# Altium PCB H202.PcbDoc (part 4 of 4)
Units mm, origin at the board's own origin, x right, y up, seen from the top; angles counter-clockwise.
Board outline 35.5 x 51.5 mm, 2 copper layers (Top Layer, Bottom Layer); 187 components, 179 nets, 669 pads, 25 vias.
Unrouted connection lines stored in the file: 414.
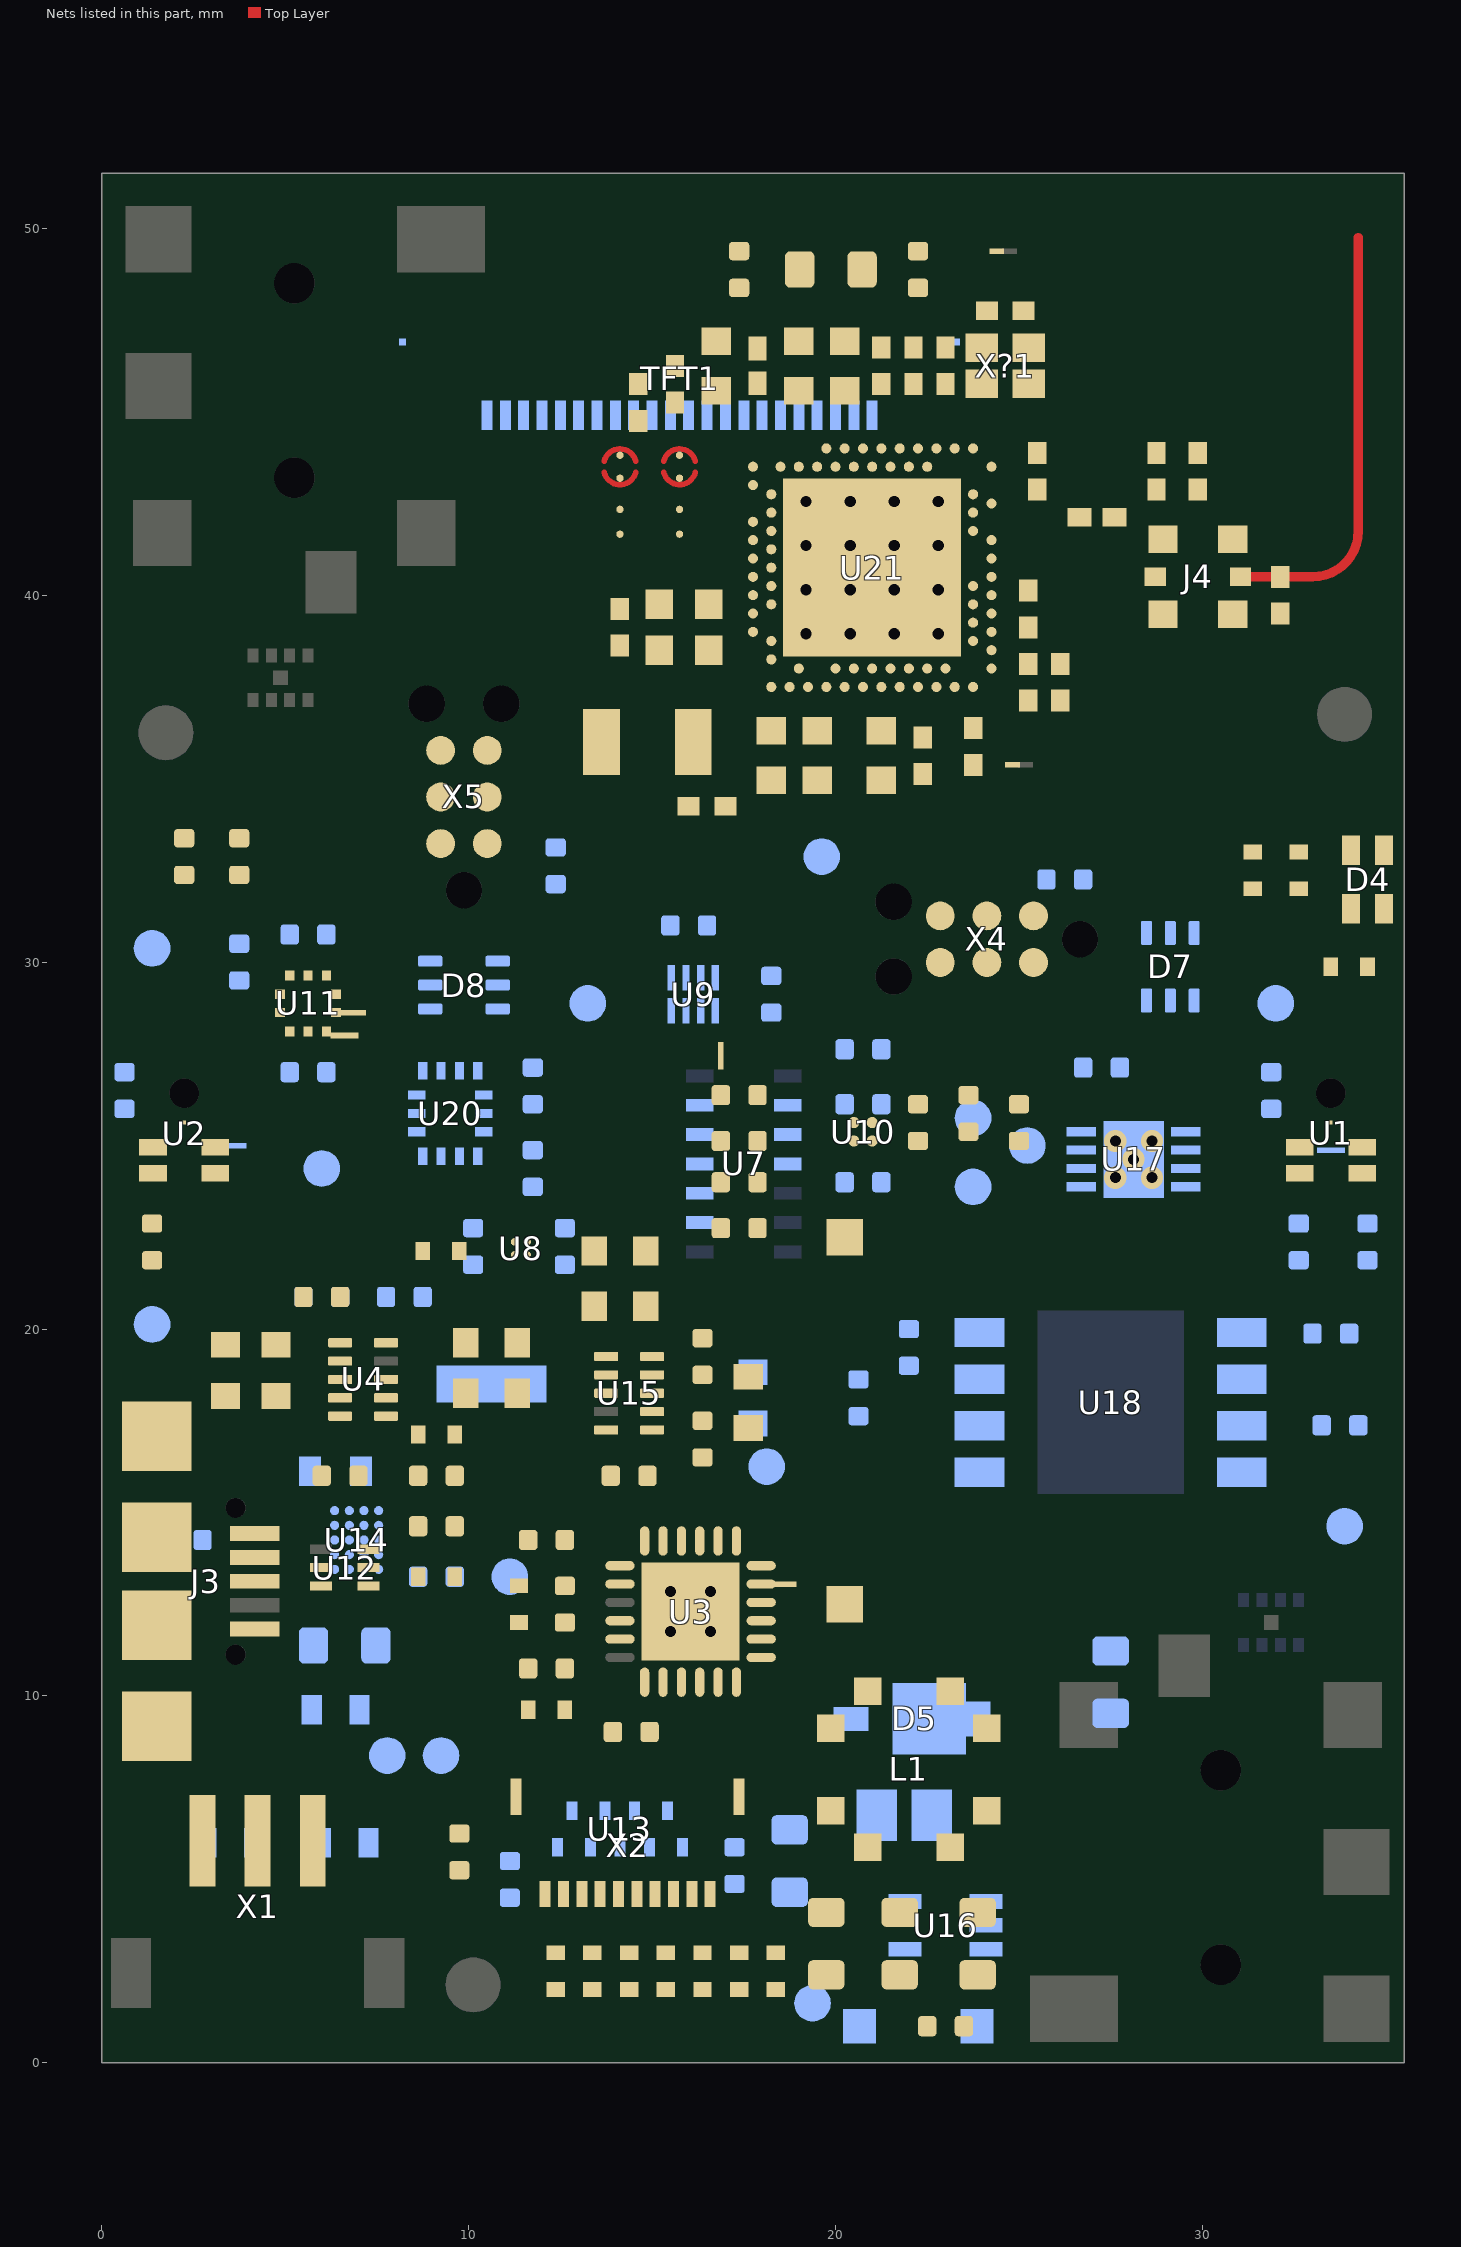
[diagram p2: the nets of this part, all layers, seen from the top]

## Part data (continued)
X2: "10 Position FFC, FPC Connector Contacts, Top and Bottom 0.020\" (0.50mm) Surface Mount, Right Angle", Actuator Color=Black, Current Rating=500mA, Flammability Rating="UL94 V-0", Housing Color=White, Manufacturer=Molex, Manufacturer Part Number=503480-1000, Max Operating Temperature=85°C, Max Voltage Rating (AC)=50V, Min Operating Temperature=-40°C, Package Quantity=1, Supplier Part Number 1=WM1389CT-ND, Actuator Material=Nylon,Glass,Polyamide, ComponentLink1Description=https://www.verical.com/server-webapp/html/getDatasheet?partID=735332&src-supplier=Verical, ComponentLink1URL=https://www.verical.com/server-webapp/html/getDatasheet?partID=735332&src-supplier=Verical, ComponentLink2Description=http://www.mouser.com/ds/2/276/5034801000_FFC_FPC_CONNECTORS-179433.pdf?src-supplier=Mouser, ComponentLink2URL=http://www.mouser.com/ds/2/276/5034801000_FFC_FPC_CONNECTORS-179433.pdf?src-supplier=Mouser, ComponentLink3Description=http://www.molex.com/webdocs/datasheets/pdf/en-us/5034801000_FFC_FPC_CONNECTORS.pdf?src-supplier=Avnet+Europe, ComponentLink3URL=http://www.molex.com/webdocs/datasheets/pdf/en-us/5034801000_FFC_FPC_CONNECTORS.pdf?src-supplier=Avnet+Europe, ComponentLink4Description=https://www.molex.com/pdm_docs/pk/SPK-503480-001.pdf?src-supplier=Digi-Key, ComponentLink4URL=https://www.molex.com/pdm_docs/pk/SPK-503480-001.pdf?src-supplier=Digi-Key, Contact Material=Bronze, Contact Plating=Gold, Depth=3.6mm, ELV=Compliant, Gender=Receptacle, Halogen Free="Low Halogen", Housing Material=Polymer, Length=6.7mm, Material=Bronze, Mating Cycles=10, Max Voltage Rating (DC)=50V, Number of Circuits=10, Number of Contacts=10, Number of Positions=10, Number of Rows=1, Orientation="Right Angle", Packaging="Tape and Reel", pin_1=KEY_1, pin_2=KEY_2, pin_3=KEY_3, pin_4=KEY_4, pin_5=KEY_5, pin_6=KEY_6, pin_7=KEY_7, pin_8=KEY_8, pin_9=GND, pin_10=GND, pin_MP1=MP1, pin_MP2=MP2, Pitch=0.5mm, Pricing 1="1=0.89, 10=0.738, 100=0.6148, 1000=0.4918 (USD)", Radiation Hardening=No, REACH SVHC=Unknown, Series="BackFlip, Easy-On 503480", Stackable=No, Stock 1=36029, Supplier 1=Digi-Key, Termination=Solder, Voltage Rating=50V, Voltage Rating (AC)=50V, Wire/Cable Type=Straight
X3: library part XTAL_SMD3215_32.768kHz_9pF_NDK, "XTAL SMD 3215, 32.768kHz, 9pF, ±20ppm", Manufacturer=NDK, Manufacturer Part Number=NX3215SA-32.768K-STD-MUA-9, Part number IPS=00000005419, Artikkelnr Noca=22010049, ComponentLink1Description=Datasheet, ComponentLink2Description="Supplier link", Footprint Doc=XTAL_3215, LatestRevisionDate=2017-10-23, Note="XTAL SMD 32.768kHz", Part Number=XTAL_SMD3215_32.768kHz_9pF_NDK, Pin Count=2, Published=2017-10-23, Publisher="Nordic Semiconductor"
X4 X5: library part TC2030-IDC-NL, "Tag-Connect TC2030-MCP-NL (3x2 pins No Legs)", Manufacturer="Tag-Connect LLC", Manufacturer Part Number=TC2030-IDC-NL
X?1: "XTAL SMD, 32MHz, Cl=8pF, Tol: ±10ppm, Stab: ±15ppm", Manufacturer="Aker Technology USA", Manufacturer Part Number=C1E-32.000-8-1015-X-R, Part number IPS=00000001431, Supplier Part Number 1=2754-C1E-32.000-8-1015-X-R-ND, ComponentLink1Description=Datasheet, ComponentLink1URL=https://www.aker-usa.com/files/content/products/crystals/C1E-General-Specification.pdf, ComponentLink2Description="Supplier link", Footprint Doc=XTAL_2016, LatestRevisionDate=2021-04-06, Note="XTAL SMD 32.000MHz", Part Number=C1E-32.000-8-1015-X-R, Pin Count=4, Published=2016-11-02, Publisher="Aker Technology USA", Supplier 1=Digikey.com
Y1: library part "SPEAKER CMS-151135-078S 15 X 11 MM ENCLOSED", "8 Ohms General Purpose Speaker 700mW 100Hz ~ 20kHz Top Rectangular", Manufacturer=CUI, Max Power Dissipation=1W, Power Rating=700mW, Self Resonant Frequency=550Hz, Supplier Part Number 1=102-4616-ND, ComponentLink1Description=https://www.cui.com/product/resource/digikeypdf/CMS-15113-078x.pdf?src-supplier=Digi-Key, ComponentLink1URL=https://www.cui.com/product/resource/digikeypdf/CMS-15113-078x.pdf?src-supplier=Digi-Key, Impedance=8R, Manufacturer Part Number=CMS-151135-078S, Packaging=Tray, Pricing 1="1=2.07, 10=1.72, 25=1.5888, 50=1.4932, 100=1.4013, 500=1.2016, 1000=1.17 (USD)", Sensing Method=Magnetic, Shape=Rectangular, Stock 1=1971, Supplier 1=Digi-Key, Type="General Purpose"
Logo1: ClassName=PCB_FEATURE

## Via types
v1: diameter 0.61, hole 0.305, Top Layer to Bottom Layer, 16 vias
v2: diameter 0.605, hole 0.3, Top Layer to Bottom Layer, tented both sides, 5 vias
v3: diameter 0.6, hole 0.3, Top Layer to Bottom Layer, 4 vias

## Nets (pads, with @x,y where several pads share a name; then routed paths per layer and width w, separated by ;. In a path a pad name is that pad's centre, name@x,y a point inside that pad or via, vN(x,y) a via of type N, cw(c..) or ccw(c..) an arc to the next point about the centre after c; other vN are vias at no path point)
1V8_HRM_PS: C14.1 C15.1 C18.2 C19.1 NT8.2 R8.2 R9.2 R10.1 U7.11 U8.A2 U9.1 U10.B2
1V8_VDD: C32.2 R11.2 U14.D1
3V3_ESP32: C1.2 C2.2 C3.2 C30.1 C35.2 C36.1 C37.1 NT1.1 R21.2 TP5.1 U1.2 U2.2 U3.7 U3.8 U14.E1 U14.E4 U15.5 U15.6 U15.7
+3V3: C17.2 C20.2 C21.1 C23.2 C31.1 C43.1 C44.1 C45.2 C46.2 C47.2 C48.1 C49.1 C73.2 C74.2 FB1.1 NT4.1 NT6.2 R29.1 R30.1 R31.1 TFT1.3 TFT1.4 TFT1.6 TP6.1 U8.A1 U9.8 U10.A2 U11.1 U14.D4 U17.8 U18.8 U20.5 U20.8 U20.10 U20.11 U20.12 X4.1 X5.1
\A_IRQ: U3.18
\A_RST: U3.9
\BMP388_INT: U11.7
\HRME_INT: R33.2
\HRMI_INT: U7.13
\MR: U13.5 U14.C1 X2.8
\PWR_CE: U14.C2
\PWR_INT: U14.D2
\PWR_LP: U14.D3
\PWR_PG: U14.B1
\STM32_RST: D7.1 X4.3
A_PA_EN: R5.1 U4.3
ADCIN: C27.2 R11.1 R12.1 R13.1 R14.1 R15.1 R16.1 R17.1 R18.1 U14.C4
ANT: C72.1 J4.3 | length 11.9
  Top Layer w0.254: J4.3@31.035,40.5 C72.1@32.125,40.5 33,40.5 ccw(c33,41.75) 34.25,41.75 34.25,49.75
ASCX: U20.3
ASDX: U20.2
CLK: D7.5 X4.4
D_N: U21.AD4
D_P: U21.AD6
DEBUG.CTS/TMS: D8.4 X5.2
DEBUG.RTS/TDO: D8.6 X5.6
DEBUG.RXD/TDI: D8.1 X5.3
DEBUG.TXD/TCLK: D8.5 X5.4
DEC1: C54.1 U21.C1
DEC3: C68.1 U21.D23
DEC4_6: C58.2 C59.1 C69.2 L3.1 U21.B5 U21.E24
DIO: D7.4 X4.2
DISP.D/C: TFT1.16
DISP.NCS: TFT1.18
DISP.NRES: TFT1.20
DISP.SPI.MOSI: R28.1
DISP.SPI.SCK: TFT1.17
DISP.TE: TFT1.19
GND: C1.1 C2.1 C3.1 C4.1 C5.1 C6.1 C7.1 C8.2 C9.2 C11.2 C12.2 C13.1 C14.2 C15.2 C16.1 C17.1 C18.1 C19.2 C20.1 C21.2 C22.2 C23.1 C24.2 C25.1 C26.1 C27.1 C28.1 C29.2 C30.2 C31.2 C32.1 C33.2 C34.2 C36.2 C37.2 C38.1 C39.2 C41.1 C42.2 C43.2 C44.2 C45.1 C46.1 C47.1 C48.2 C49.2 C50.2 C51.1 C52.1 C53.2 C54.2 C55.2 C56.2 C57.2 C58.1 C59.2 C60.2 C61.2 C62.2 C63.1 C64.2 C65.2 C66.2 C67.2 C68.2 C69.1 C70.1 C71.2 C72.2 C73.1 C74.1 D1.2 D2.2 D3.2 D7.2 D7.3 D8.2 D8.3 J3.5 J3.S1 J3.S2 J3.S3 J3.S4 J4.2 L1.1 NT2.1 NT3.1 NT5.2 NT7.2 R4.2 R5.2 R7.2 R10.2 R19.1 R20.2 R22.2 R26.1 R32.1 R33.1 TFT1.5 TFT1.7 TFT1.8 TFT1.9 TFT1.10 TFT1.11 TFT1.12 TFT1.13 TFT1.14 TFT1.15 TFT1.22 TFT1.23 TFT1.24 TP9.1 TP10.1 TP11.1 TP12.1 TP13.1 TP14.1 TP15.1 U1.5 U2.5 U3.24 U3.25 U4.9 U4.10 U7.4 U7.12 U8.B2 U9.4 U10.B1 U11.3 U11.8 U11.9 U12.3 U13.3 U14.A4 U14.C3 U15.9 U15.10 U16.2 U17.5 U17.9 U18.4 U20.6 U20.7 U21.74 U21.B7 U21.F23 X1.3 X2.9 X2.10 X2.S1 X2.S2 X4.5 X5.5 X?1.2 X?1.4
  other v1: 19.2,38.95 20.4,38.95 21.6,38.95 22.8,38.95 19.2,40.15 20.4,40.15 21.6,40.15 22.8,40.15 19.2,41.35 20.4,41.35 21.6,41.35 22.8,41.35 19.2,42.55 20.4,42.55 21.6,42.55 22.8,42.55
  other v2: 27.625,24.125 28.625,24.125 28.125,24.625 27.625,25.125 28.625,25.125
  other v3: 15.5,11.75 16.6,11.75 15.5,12.85 16.6,12.85
HRME_EN: R32.2
HRMI_EN: U8.B1
I2C1.SCL: TP3.1 U14.E3
I2C1.SDA: TP4.1 U14.E2
I2C.SCL: TP1.1 U3.19 U9.7 U11.2 U17.6
I2C.SDA: TP2.1 U3.20 U9.6 U11.4 U17.7
I2S.BCK: U3.16
I2S.MCLK: U3.12
I2S.SDI: U3.14
I2S.SDO: U3.15
I2S.WS: U3.13
INT1: U20.4
INT2: U20.9
KEY_1: R12.2 U13.1 X2.1
KEY_2: R13.2 U13.9 X2.2
KEY_3: R14.2 U13.2 X2.3
KEY_4: R15.2 U13.8 X2.4
KEY_5: R16.2 U13.7 X2.5
KEY_6: R17.2 U13.4 X2.6
KEY_7: R18.2 U13.6 X2.7
LCD_BL_A: C41.2 C42.1 D5.1 D6.1 R27.1 TFT1.1
LCD_BL_K: D6.2 R26.2 R27.2 TFT1.2 U16.3
LCD_BL_PWM: U16.4 U17.4
LR_SEL1: NT1.2 U1.4
LR_SEL2: NT2.2 U2.4
MICCLK: R1.2 U3.10
MICDO: R2.1 R3.1 U3.11
NetC4_2: C4.2 R4.1 U3.5
NetC5_2: C5.2 C7.2 U3.4
NetC10_1: C10.1 R6.1 R7.1 U4.8
NetC13_2: C13.2 C16.2 C22.1 U7.9 U7.10 U10.A1
NetC24_1: C24.1 FB1.2 U11.10
NetC35_1: C35.1 R21.1 R22.1 U15.8
NetC38_2: C38.2 C39.1 FB2.2 L1.4 U16.5
NetC40_1: C40.1 L1.3 U16.1
NetC40_2: C40.2 D5.2 L1.2
NetC51_2: C51.2 SB3.1 X3.1
NetC52_2: C52.2 SB4.1 X3.2
NetC55_1: C55.1 U21.AC5
NetC61_1: C61.1 U21.A18
NetC63_2: C63.2 L5.1 U21.H23
NetC64_1: C64.1 U21.N24
NetD1_1: D1.1 U14.A3 U14.B3 X1.1
NetD2_1: D2.1 R19.2 U14.B4 X1.2
NetD4_BK: D4.BK R23.2
NetD4_GK: D4.GK R24.2
NetD4_RK: D4.RK R25.2
NetL2_2: L2.2 U21.AB2
NetL3_2: L3.2 L4.1
NetL4_2: L4.2 U21.B3
NetNT3_2: NT3.2 U3.17 U3.21 U3.22
NetNT4_2: NT4.2 U11.6
NetNT5_1: NT5.1 U11.5
NetNT8_1: NT8.1 U9.5
NetNT9_1: NT9.1 R20.1 U15.3
NetR1_1: R1.1 U1.3 U2.3
NetR2_2: R2.2 U1.1
NetR3_2: R3.2 U2.1
NetR8_1: R8.1 U7.3 U9.3
NetR9_1: R9.1 U7.2 U9.2
NetR23_1: R23.1 U17.1
NetR24_1: R24.1 U17.2
NetR25_1: R25.1 U17.3
NetR28_2: R28.2 TFT1.21
NetU3_1: U3.1 Y1.M
NetU3_23: U3.23 Y1.P
P0.00: SB1.2
P0.00/XL1: SB1.1 SB3.2 U21.D2
P0.01: SB2.2
P0.01/XL2: SB2.1 SB4.2 U21.F2
P0.02/AIN0: U21.A12
P0.03/AIN1: U21.B13
P0.04/AIN2: U21.J1
P0.05/AIN3: U21.K2
P0.06: U21.L1
P0.07: U21.M2
P0.08: U21.N1
P0.09/NFC1: U21.L24
P0.10/NFC2: U21.J24
P0.11: U21.T2
P0.12: U21.U1
P0.13: U21.AD8
P0.14: U21.AC9
P0.15: U21.AD10
P0.16: U21.AC11
P0.17: U21.AD12
P0.18/RESET: U21.AC13
P0.19: U21.AC15
P0.20: U21.AD16
P0.21: U21.AC17
P0.22: U21.AD18
P0.23: U21.AC19
P0.24: U21.AD20
P0.25: U21.AC21
P0.26: U21.G1
P0.27: U21.H2
P0.28/AIN4: U21.B11
P0.29/AIN5: U21.A10
P0.30/AIN6: U21.B9
P0.31/AIN7: U21.A8
P1.00: U21.AD22
P1.01: U21.Y23
P1.02: U21.W24
P1.03: U21.V23
P1.04: U21.U24
P1.05: U21.T23
P1.06: U21.R24
P1.07: U21.P23
P1.08: U21.P2
P1.09: U21.R1
P1.10: U21.A20
P1.11: U21.B19
P1.12: U21.B17
P1.13: U21.A16
P1.14: U21.B15
P1.15: U21.A14
PIN#6_P01: D7.6 X4.6
QSPI.CLK: U18.6
QSPI.IO0/DO: U18.5
QSPI.IO1/DI: U18.2
QSPI.IO2/WP: R30.2 U18.3
QSPI.IO3/HD: R31.2 U18.7
QSPI.NCS: R29.2 U18.1
RF: C70.2 C71.1 J4.1 L5.2
SCX: U20.13
SDO: U20.1
SDX: U20.14
SWDCLK: U21.AA24
SWDIO: U21.AC24
USB.D_N: U12.2
USB.D_P: U12.1
USB_CONN_N: J3.2 U12.5
USB_CONN_P: J3.3 U12.6
VBUS: C25.2 C26.2 C28.2 D3.1 J3.1 TP8.1 U14.A1
VBUS_nRF: C57.1 U21.AD2
VDD_HV: C53.1 U21.Y2
VDD_nRF: C50.1 C56.1 C60.1 C62.1 C65.1 L2.1 U21.A22 U21.AD14 U21.AD23 U21.B1 U21.W1
VDD_PA: C6.2 C10.2 C11.1 C12.1 R6.2 U3.2 U4.5 U4.6 U4.7
VSYS: C8.1 C9.1 C29.1 C33.1 C34.1 D4.A FB2.1 NT9.2 TP7.1 U4.1 U4.2 U14.A2 U14.B2 U15.1 U15.2
XC1: C67.1 U21.B24 X?1.1
XC2: C66.1 U21.A23 X?1.3
pads on no net: FID1. FID2. FID3. J1. J1.1 J1.2 J1.3 J1.4 J1.5 J1.10 J2. J2.1 J2.2 J2.3 J2.4 J2.5 J2.10 J3. J3.4 NT6.1 NT7.1 U1. U2. U3.3 U3.6 U4.4 U5.1 U5.2 U5.3 U5.4 U5.5 U5.6 U5.7 U5.8 U5.9 U6.1 U6.2 U6.3 U6.4 U6.5 U6.6 U6.7 U6.8 U6.9 U7.1 U7.5 U7.6 U7.7 U7.8 U7.14 U12.4 U15.4 U18.9 X1.S1 X1.S2 X4.0 X5.0

## Silkscreen, mask and mechanical layers (free items; w line width, h text height)
Top Overlay:
  text "SWD Debug" at 7.65,30.067 h0.5
  text "UART Tag" at 22.4,28.317 h0.5

## Text inside footprints (layer, text, board x,y; h text height)
J3: Mechanical 13 "PCB EDGE" at -1,8.25 h0.5 r270
Logo1: Bottom Overlay "Acme" at 32.5,40.725 h0.5; Bottom Overlay "CPU" at 27.5,37.125 h0.5
TFT1: Mechanical 14 "1" at 20.83,46.535 h1 r180; Mechanical 14 "22" at 9.781,46.535 h1 r180; Mechanical 19 "Center of the panel" at 24.85,26.3 h1 r180; Mechanical 19 "Center of the screen" at 24.65,22.3 h1 r180; Mechanical 19 "Top Left Corner" at 30.55,4.1 h1 r180
X4: Mechanical 14 "1" at 25.525,31.525 h0.5 r180; Mechanical 14 "2" at 25.625,30.225 h0.5 r180; Mechanical 14 "3" at 24.325,31.525 h0.5 r180; Mechanical 14 "4" at 24.325,30.225 h0.5 r180; Mechanical 14 "5" at 23.025,31.525 h0.5 r180; Mechanical 14 "6" at 23.025,30.225 h0.5 r180
X5: Mechanical 14 "1" at 10.775,33.1 h0.5 r90; Mechanical 14 "2" at 9.475,33 h0.5 r90; Mechanical 14 "3" at 10.775,34.3 h0.5 r90; Mechanical 14 "4" at 9.475,34.3 h0.5 r90; Mechanical 14 "5" at 10.775,35.6 h0.5 r90; Mechanical 14 "6" at 9.475,35.6 h0.5 r90
Y1: Top Overlay "-" at 18.04,22.9 h0.5 r270; Top Overlay "+" at 18.04,12.9 h0.5 r270